# EAGLE board Proiect TSC v6 (EAGLE 9.7.0)
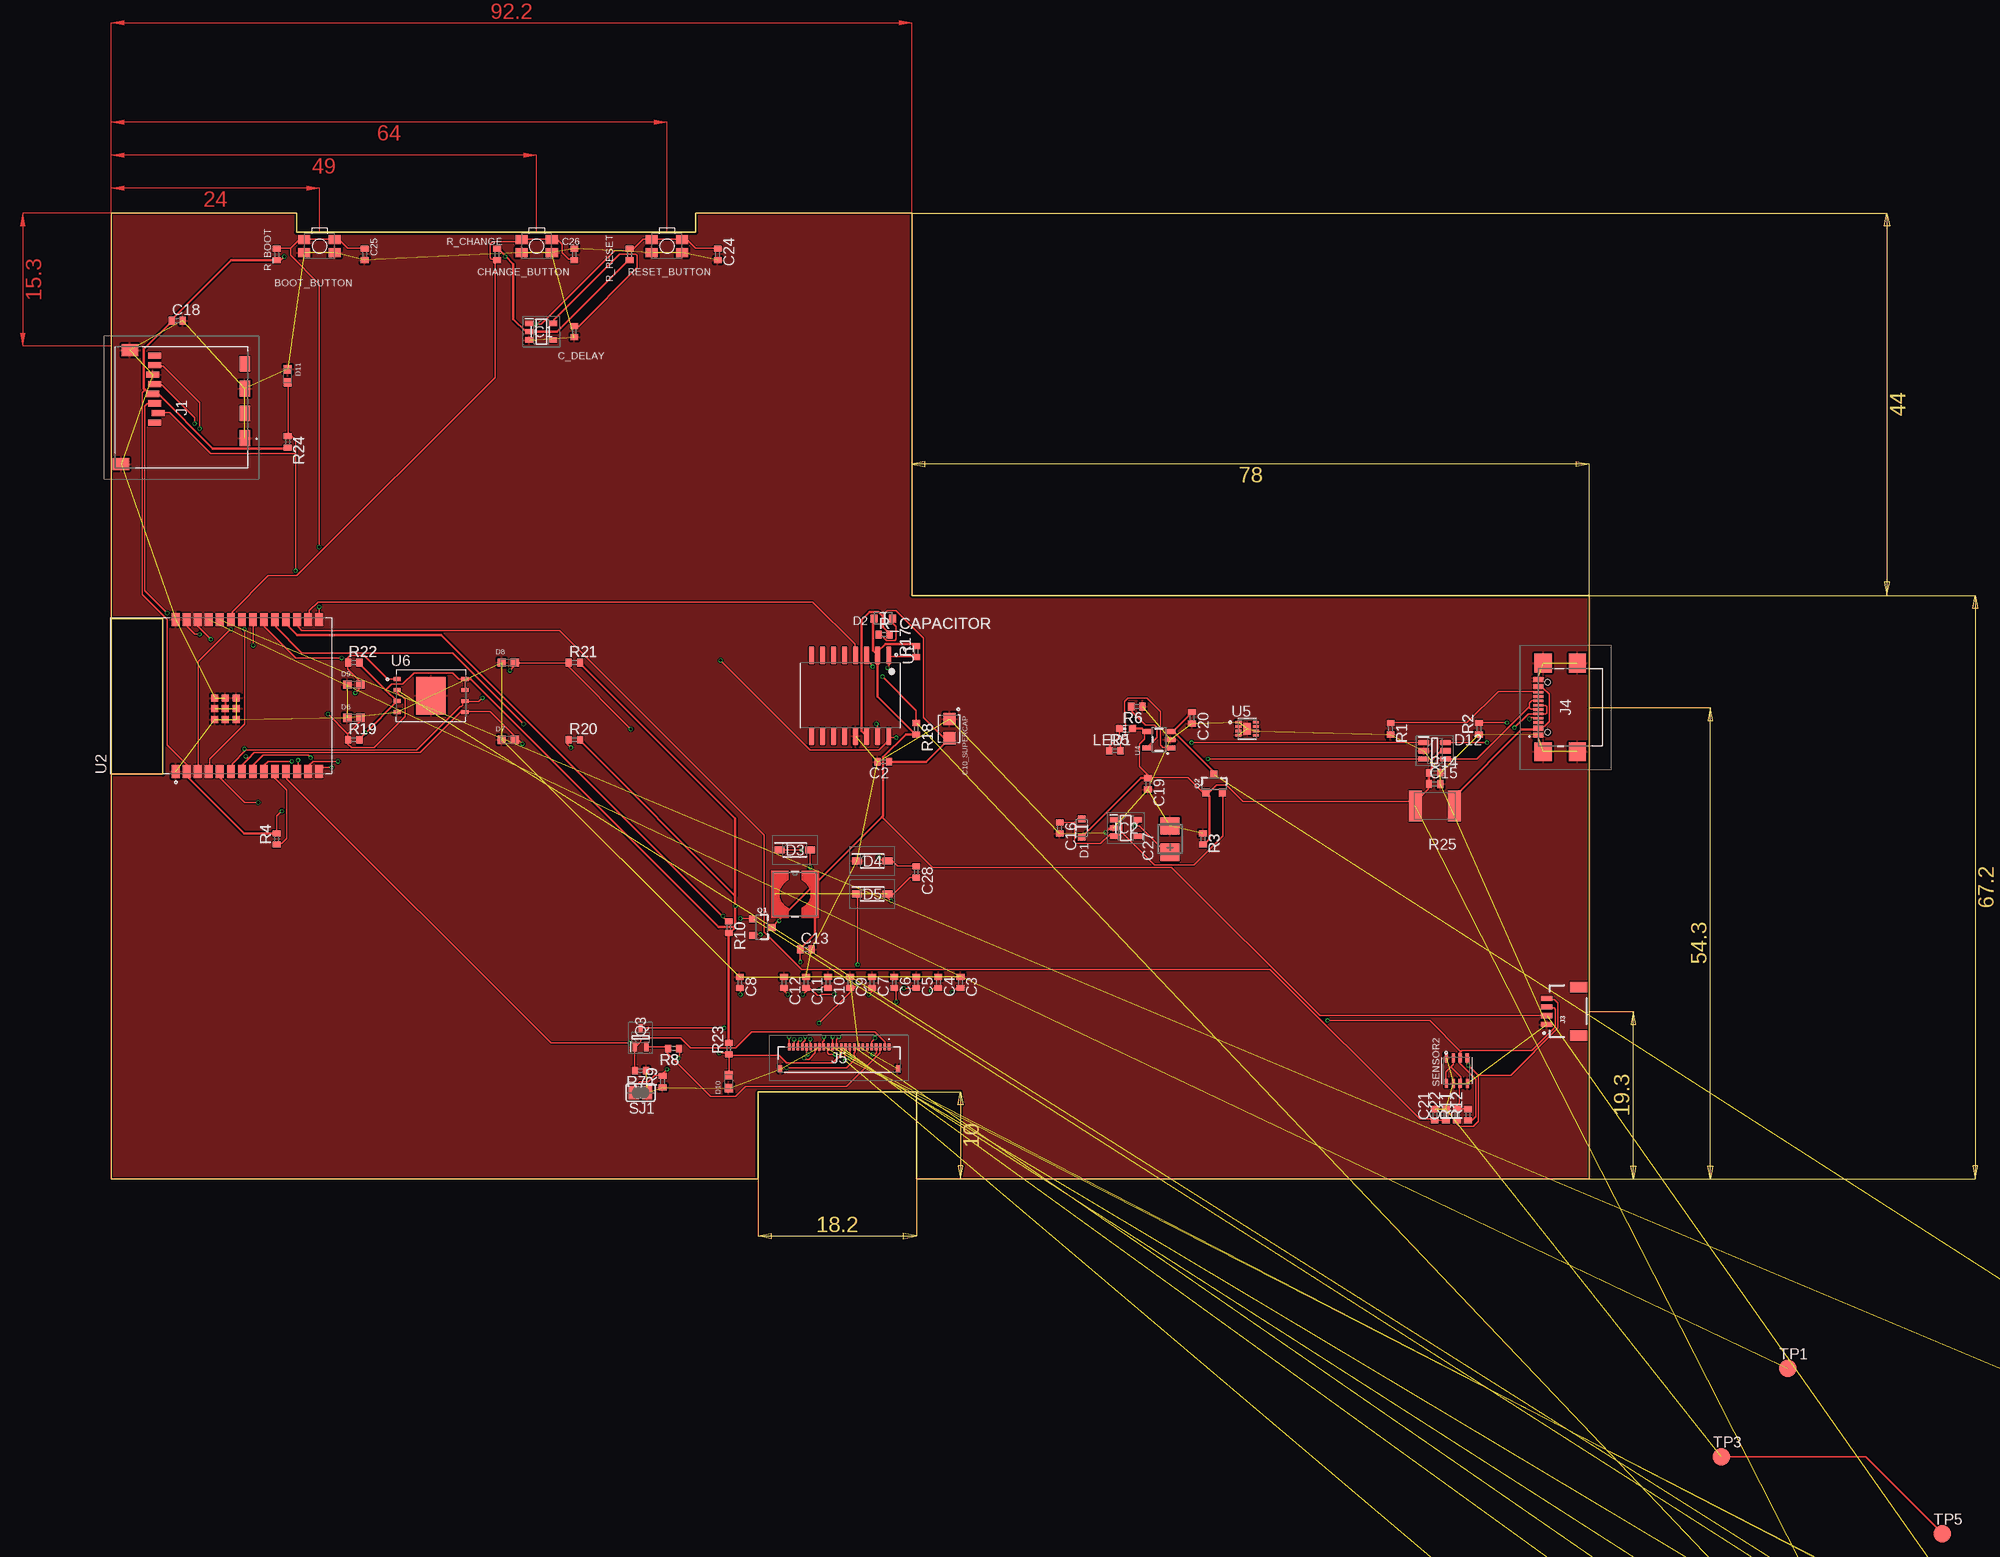
[diagram p0: board, top side]
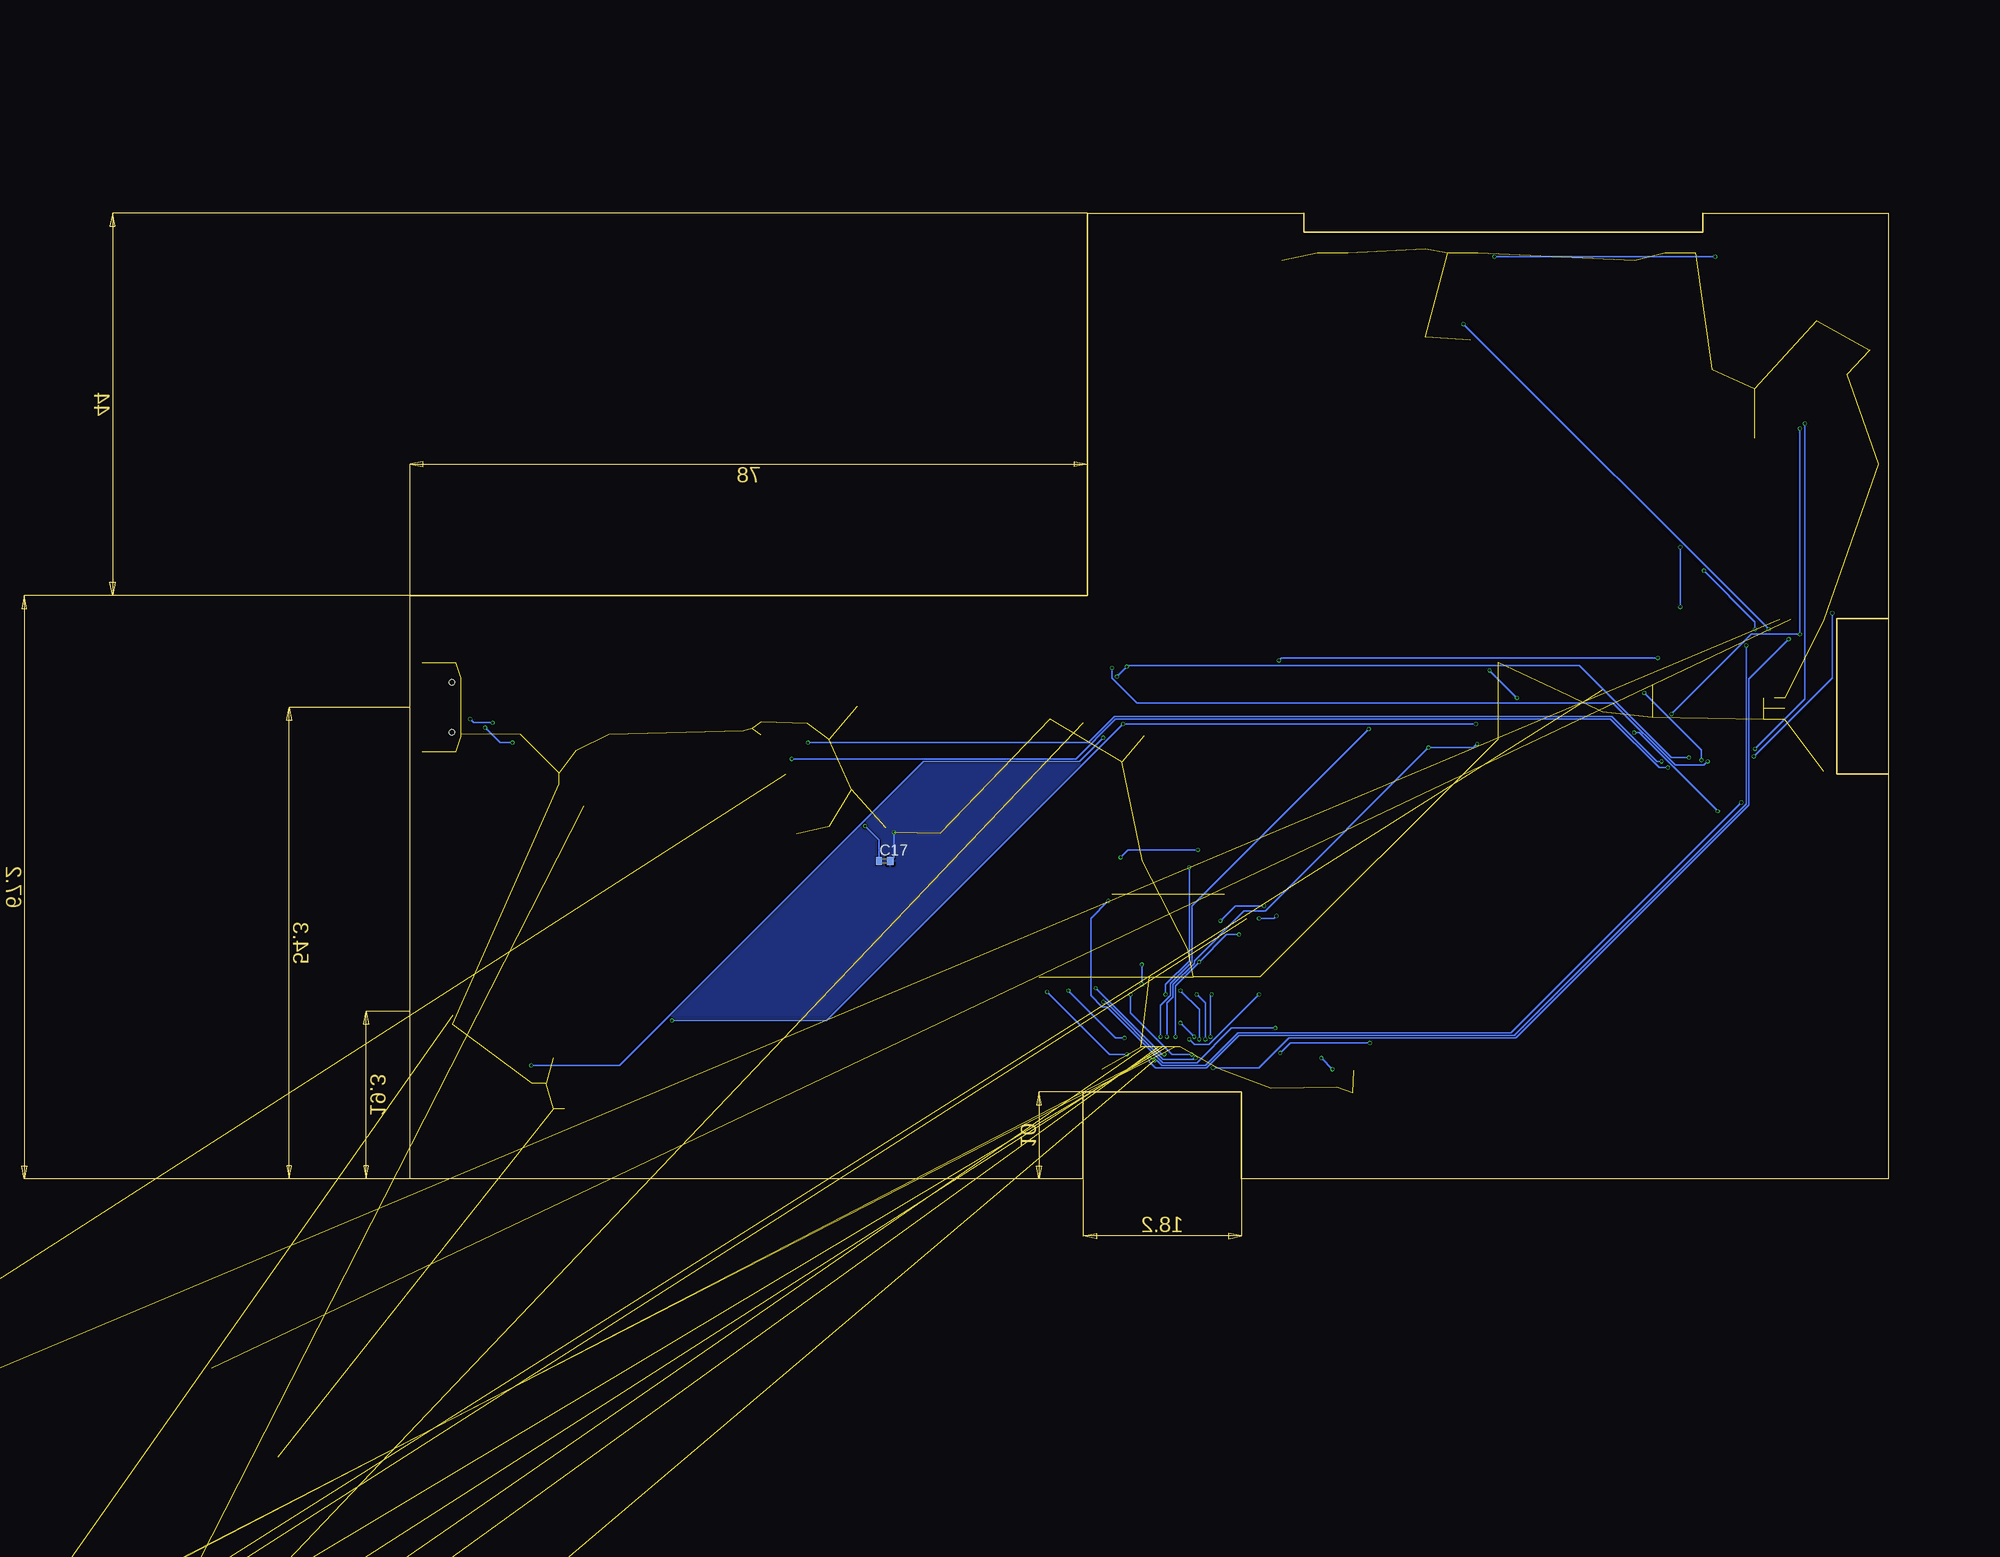
[diagram p1: board, bottom side, seen from below]

Size 170.2 x 111.2 mm. Coordinates in mm from the lower left corner, seen from the top.
Outline: 0,64.54 0,111.2 21.35,111.2 21.35,108.99 67.31,108.99 67.31,111.2 92.2,111.2 92.2,67.2 170.2,67.2 170.2,0 92.71,0 92.71,10 74.51,10 74.51,0 0,0 0,46.62
Outline: 0,64.54 0,46.62
Outline: 0,64.54 5.96,64.54 5.96,46.62 0,46.62
Copper layers (1*16): Top 0.035mm / dielectric 1.6mm / Bottom 0.035mm
Design rules "Fusion Electronics Design Rules": minimum track width 0.16mm, minimum drill 0.3mm, track to track 5mil, track to pad 5mil, pad to pad 5mil, via to via 5mil, smd to smd 5mil, copper to edge 0.2mm, drill to drill 6mil, minimum pad ring 10mil, minimum via ring 3mil, stop-mask expansion 4mil, vias tented up to drill 0mil, thermal gap 10mil

## Footprints (pad centres in the part's own frame; a part is rotated, then mirrored left to right if it is on the bottom)
MYBUTTON = smd 1.4 x 1.05: 1 1.75,0.75; 2 -1.75,0.75; 3 -1.75,-0.75; 4 1.75,-0.75
ESP32_WROVER_EAGLE-LTSPICE_C0402 = smd 0.7 x 0.9: 1 -0.65,0; 2 0.65,0
CAPCP3225X100N = smd 1.4 x 1.4: 1 -1.1,0; 2 1.1,0
RCL_CT3528 = smd 2 x 2.2: + -1.5,0; - 1.5,0
ESP32_WROVER_AVX---SD0805S020S1R0_AVX_SD0805S020S1R0_0 = smd 0.8 x 0.9: 1 -1.05,0; 2 1.05,0
SOD3716X135N = smd 1.15 x 0.8: 1 -1.75,0; 2 1.75,0
DIOC1608X36N = smd 0.97 x 0.94: 1 -0.75,0; 2 0.75,0
SOT95P280X145-6N = smd 1.2 x 0.6: 1 -1.25,0.95; 2 -1.25,0; 3 -1.25,-0.95; 4 1.25,-0.95; 5 1.25,0; 6 1.25,0.95
SOT95P280X125-5N = smd 0.9 x 0.6: 1 -1.4,0.95; 2 -1.4,0; 3 -1.4,-0.95; 4 1.4,-0.95; 5 1.4,0.95
SOT95P280X120-5N = smd 0.9 x 0.6: 1 -1.4,0.95; 2 -1.4,0; 3 -1.4,-0.95; 4 1.4,-0.95; 5 1.4,0.95
112ATAARR03ATTEND = smd 1.8 x 1.2: G1 10.6,10.4; G2 4.9,10.4; S1 7.75,10.4; S2 2.05,10.4 | smd 1.4 x 1.9: G3 13.6,-3.85; G4 0.45,-2.85 | smd 0.7 x 1.5: P1 8.8,0; P2 7.7,0.4; P3 6.6,0; P4 5.5,-0.2; P5 4.4,0; P6 3.3,-0.2; P7 2.2,0; P8 1.1,0
JST04_1MM_RA = smd 0.6 x 1.35: 1 -1.5,0; 2 -0.5,0; 3 0.5,0; 4 1.5,0 | smd 1.2 x 2: NC1 2.8,-3.675; NC2 -2.8,-3.675
SAMACSYS_PARTS_USB4110GFA = smd 0.3 x 1.15: A1 -3.35,3.678; A4 -2.55,3.678; A5 -1.25,3.678; A6 -0.25,3.678; A7 0.25,3.678; A8 1.25,3.678; A9 2.55,3.678; A12 3.35,3.678; B1 3.05,3.678; B4 2.25,3.678; B5 1.75,3.678; B6 0.75,3.678; B7 -0.75,3.678; B8 -1.75,3.678; B9 -2.25,3.678; B12 -3.05,3.678 | smd 2.18 x 2: MP1 -5.11,-0.827; MP2 5.11,-0.827; MP3 -5.11,3.103; MP4 5.11,3.103 | hole 0.65: -2.89,2.603; 2.89,2.603
FH34SRJ24S05SH99 = smd 0.3 x 0.8: 1 5.75,1.45; 2 5.25,1.45; 3 4.75,1.45; 4 4.25,1.45; 5 3.75,1.45; 6 3.25,1.45; 7 2.75,1.45; 8 2.25,1.45; 9 1.75,1.45; 10 1.25,1.45; 11 0.75,1.45; 12 0.25,1.45; 13 -0.25,1.45; 14 -0.75,1.45; 15 -1.25,1.45; 16 -1.75,1.45; 17 -2.25,1.45; 18 -2.75,1.45; 19 -3.25,1.45; 20 -3.75,1.45; 21 -4.25,1.45; 22 -4.75,1.45; 23 -5.25,1.45; 24 -5.75,1.45 | smd 0.4 x 0.8: MP1 6.75,-1.05; MP2 -6.75,-1.05
IND_4828-WE-TPC_WRE = smd 0.127 x 0.127: 1 -2.286,0; 2 2.286,0
ADAFRUIT_CHIP-LED0603 = smd 0.8 x 0.8: A 0,-0.75; C 0,0.75
ESP32_WROVER_SPARKFUN-DISCRETESEMI_SOT23-3 = smd 0.8 x 0.9: 1 -0.95,-1; 2 0.95,-1; 3 0,1.1
SOT65P210X110-3N = smd 1.05 x 0.5: 1 -1.05,0.65; 2 -1.05,-0.65; 3 1.05,0
ESP32_WROVER_EAGLE-LTSPICE_R0402 = smd 0.7 x 0.9: 1 -0.65,0; 2 0.65,0
ESP32C6_VARISTOR_CT/CN1812 = smd 1.5 x 3.6: 1 -2.25,0; 2 2.25,0
ESP32_WROVER_BME680_PSON80P300X300X100-8N = smd 1.016 x 0.5: 1 1.458,1.2; 2 1.458,0.4; 3 1.458,-0.4; 4 1.458,-1.2; 5 -1.458,-1.22; 6 -1.458,-0.4; 7 -1.458,0.4; 8 -1.458,1.2
SJ = smd 1.168 x 1.6: 1 -0.762,0; 2 0.762,0
TP20R = smd 2 x 2: TP 0,0
SOIC127P1032X265-16N = smd 2.05 x 0.59: 1 -4.655,4.445; 2 -4.655,3.175; 3 -4.655,1.905; 4 -4.655,0.635; 5 -4.655,-0.635; 6 -4.655,-1.905; 7 -4.655,-3.175; 8 -4.655,-4.445; 9 4.655,-4.445; 10 4.655,-3.175; 11 4.655,-1.905; 12 4.655,-0.635; 13 4.655,0.635; 14 4.655,1.905; 15 4.655,3.175; 16 4.655,4.445
XCVR_ESP32-C6-WROOM-1-N8 = smd 1.5 x 0.9: 1 -8.75,5.26; 2 -8.75,3.99; 3 -8.75,2.72; 4 -8.75,1.45; 5 -8.75,0.18; 6 -8.75,-1.09; 7 -8.75,-2.36; 8 -8.75,-3.63; 9 -8.75,-4.9; 10 -8.75,-6.17; 11 -8.75,-7.44; 12 -8.75,-8.71; 13 -8.75,-9.98; 14 -8.75,-11.25; 15 8.75,-11.25; 16 8.75,-9.98; 17 8.75,-8.71; 18 8.75,-7.44; 19 8.75,-6.17; 20 8.75,-4.9; 21 8.75,-3.63; 22 8.75,-2.36; 23 8.75,-1.09; 24 8.75,0.18; 25 8.75,1.45; 26 8.75,2.72; 27 8.75,3.99; 28 8.75,5.26 | smd 0.8 x 0.8: 29_1 -2.755,0.79; 29_2 -1.505,0.79; 29_3 -0.255,0.79; 29_4 -2.755,-0.46; 29_5 -1.505,-0.46; 29_6 -0.255,-0.46; 29_7 -2.755,-1.71; 29_8 -1.505,-1.71; 29_9 -0.255,-1.71
ESP32_WROVER_SPARKFUN-IC-POWER_SOT23-5 = smd 0.55 x 1.2: 1 -0.95,-1.3; 2 0,-1.3; 3 0.95,-1.3; 4 0.95,1.3; 5 -0.95,1.3
SON50P200X200X80-9N = smd 0.76 x 0.27: 1 -0.985,0.75; 2 -0.985,0.25; 3 -0.985,-0.25; 4 -0.985,-0.75; 5 0.985,-0.75; 6 0.985,-0.25; 7 0.985,0.25; 8 0.985,0.75 | smd 0.9 x 1.3: 9 0,0
SON127P600X800X80-9N = smd 0.94 x 0.44: 1 -3.895,1.905; 2 -3.895,0.635; 3 -3.895,-0.635; 4 -3.895,-1.905; 5 3.895,-1.905; 6 3.895,-0.635; 7 3.895,0.635; 8 3.895,1.905 | smd 3.4 x 4.3: 9 0,0

## Placement (x,y rotation side)
BOOT_BUTTON  BUTTON_CUSYOMV1  [MYBUTTON]  24,107.4 180 top
C2  100nF  [ESP32_WROVER_EAGLE-LTSPICE_C0402]  88.9,48.03 180 top
C3  1uF/50V  [ESP32_WROVER_EAGLE-LTSPICE_C0402]  97.79,22.63 270 top
C4  1uF/50V  [ESP32_WROVER_EAGLE-LTSPICE_C0402]  95.25,22.63 270 top
C5  1uF/50V  [ESP32_WROVER_EAGLE-LTSPICE_C0402]  92.71,22.63 270 top
C6  1uF/50V  [ESP32_WROVER_EAGLE-LTSPICE_C0402]  90.17,22.63 270 top
C7  1uF/50V  [ESP32_WROVER_EAGLE-LTSPICE_C0402]  87.63,22.63 270 top
C8  1uF/50V  [ESP32_WROVER_EAGLE-LTSPICE_C0402]  72.39,22.63 270 top
C9  1uF/50V  [ESP32_WROVER_EAGLE-LTSPICE_C0402]  85.09,22.63 270 top
C10  1uF/50V  [ESP32_WROVER_EAGLE-LTSPICE_C0402]  82.55,22.63 270 top
C10_SUPERCAP  CPH3225A  [CAPCP3225X100N]  96.52,51.84 270 top
C11  1uF/50V  [ESP32_WROVER_EAGLE-LTSPICE_C0402]  80.01,22.63 270 top
C12  1uF/50V  [ESP32_WROVER_EAGLE-LTSPICE_C0402]  77.47,22.63 270 top
C13  10uF  [ESP32_WROVER_EAGLE-LTSPICE_C0402]  80.01,26.44 0 top
C14  [ESP32_WROVER_EAGLE-LTSPICE_C0402]  152.4,46.76 0 top
C15  [ESP32_WROVER_EAGLE-LTSPICE_C0402]  152.4,45.49 0 top
C16  4.7uF  [ESP32_WROVER_EAGLE-LTSPICE_C0402]  109.22,40.41 270 top
C17  4.7uF  [ESP32_WROVER_EAGLE-LTSPICE_C0402]  115.57,36.6 0 bottom
C18  100nF  [ESP32_WROVER_EAGLE-LTSPICE_C0402]  7.62,98.83 0 top
C19  4.7Uf  [ESP32_WROVER_EAGLE-LTSPICE_C0402]  119.38,45.49 270 top
C20  4.7Uf  [ESP32_WROVER_EAGLE-LTSPICE_C0402]  124.46,53.11 270 top
C21  100nF  [ESP32_WROVER_EAGLE-LTSPICE_C0402]  152.4,7.39 90 top
C22  100nF  [ESP32_WROVER_EAGLE-LTSPICE_C0402]  153.67,7.39 90 top
C24  1uF  [ESP32_WROVER_EAGLE-LTSPICE_C0402]  69.85,106.45 270 top
C25  100nF  [ESP32_WROVER_EAGLE-LTSPICE_C0402]  29.21,106.45 270 top
C26  100nF  [ESP32_WROVER_EAGLE-LTSPICE_C0402]  53.34,106.45 90 top
C27  100uF TANT  [RCL_CT3528]  121.92,39.14 90 top
C28  [ESP32_WROVER_EAGLE-LTSPICE_C0402]  92.71,35.33 270 top
C_DELAY  100nF  [ESP32_WROVER_EAGLE-LTSPICE_C0402]  53.34,97.56 270 top
CHANGE_BUTTON  BUTTON_CUSYOMV1  [MYBUTTON]  49,107.4 180 top
D1  ESP32_WROVER_AVX---SD0805S020S1R0_AVX_SD0805S020S1R0_0_0AVX_SD0805S020S1R0_0_0  [ESP32_WROVER_AVX---SD0805S020S1R0_AVX_SD0805S020S1R0_0]  111.76,40.41 270 top
D2  ESP32_WROVER_AVX---SD0805S020S1R0_AVX_SD0805S020S1R0_0_0AVX_SD0805S020S1R0_0_0  [ESP32_WROVER_AVX---SD0805S020S1R0_AVX_SD0805S020S1R0_0]  88.9,64.54 180 top
D3  MBR0530  [SOD3716X135N]  78.74,37.87 0 top
D4  MBR0530  [SOD3716X135N]  87.63,36.6 0 top
D5  MBR0530  [SOD3716X135N]  87.63,32.79 0 top
D6  PGB1010603MR  [DIOC1608X36N]  27.94,53.11 0 top
D7  PGB1010603MR  [DIOC1608X36N]  45.72,50.57 0 top
D8  PGB1010603MR  [DIOC1608X36N]  45.72,59.46 0 top
D9  PGB1010603MR  [DIOC1608X36N]  27.94,56.92 0 top
D10  PGB1010603MR  [DIOC1608X36N]  71.12,11.2 90 top
D11  PGB1010603MR  [DIOC1608X36N]  20.32,92.48 270 top
D12  USBLC6-2SC6Y  [SOT95P280X145-6N]  152.4,49.3 0 top
IC1  BD5229G-TR  [SOT95P280X125-5N]  49.53,97.56 0 top
IC2  XC6220A331MR-G  [SOT95P280X120-5N]  116.84,40.41 0 top
J1  112A-TAAR-R03_ATTEND  [112ATAARR03ATTEND]  5,95.9 270 top
J3  QWIIC_RIGHT_ANGLE  [JST04_1MM_RA]  165.3,19.3 90 top
J4  SAMACSYS_PARTS_USB4110-GF-A  [SAMACSYS_PARTS_USB4110GFA]  168,54.3 90 top
J5  FH34SRJ-24S-0.5SH_99_  [FH34SRJ24S05SH99]  83.82,13.74 0 top
L1  744043680IND_4828-WE-TPC_WRE  [IND_4828-WE-TPC_WRE]  78.74,32.79 0 top
LED1  [ADAFRUIT_CHIP-LED0603]  116.84,51.84 90 top
Q1  20V/4.2A/52mΩ/1.4W  [ESP32_WROVER_SPARKFUN-DISCRETESEMI_SOT23-3]  74.93,28.98 270 top
Q2  20V/4.2A/52mΩ/1.4W  [ESP32_WROVER_SPARKFUN-DISCRETESEMI_SOT23-3]  127,45.49 0 top
Q3  SI1308EDL-T1-GE3  [SOT65P210X110-3N]  60.96,16.28 90 top
R1  [ESP32_WROVER_EAGLE-LTSPICE_R0402]  147.32,51.84 270 top
R2  [ESP32_WROVER_EAGLE-LTSPICE_R0402]  157.48,51.84 90 top
R3  100k  [ESP32_WROVER_EAGLE-LTSPICE_R0402]  125.73,39.14 270 top
R4  10K  [ESP32_WROVER_EAGLE-LTSPICE_R0402]  19.05,39.14 90 top
R5  200  [ESP32_WROVER_EAGLE-LTSPICE_R0402]  115.57,49.3 0 top
R6  2k  [ESP32_WROVER_EAGLE-LTSPICE_R0402]  118.11,54.38 180 top
R7  10K  [ESP32_WROVER_EAGLE-LTSPICE_R0402]  60.96,12.47 180 top
R8  0.47  [ESP32_WROVER_EAGLE-LTSPICE_R0402]  64.77,15.01 180 top
R9  2.2  [ESP32_WROVER_EAGLE-LTSPICE_R0402]  63.5,11.2 90 top
R10  10K  [ESP32_WROVER_EAGLE-LTSPICE_R0402]  71.12,28.98 270 top
R11  10K  [ESP32_WROVER_EAGLE-LTSPICE_R0402]  154.94,7.39 90 top
R12  10K  [ESP32_WROVER_EAGLE-LTSPICE_R0402]  156.21,7.39 90 top
R17  10K  [ESP32_WROVER_EAGLE-LTSPICE_R0402]  92.71,60.73 90 top
R18  10K  [ESP32_WROVER_EAGLE-LTSPICE_R0402]  92.71,51.84 270 top
R19  10K  [ESP32_WROVER_EAGLE-LTSPICE_R0402]  27.94,50.57 0 top
R20  10K  [ESP32_WROVER_EAGLE-LTSPICE_R0402]  53.34,50.57 0 top
R21  10K  [ESP32_WROVER_EAGLE-LTSPICE_R0402]  53.34,59.46 0 top
R22  10K  [ESP32_WROVER_EAGLE-LTSPICE_R0402]  27.94,59.46 0 top
R23  10K  [ESP32_WROVER_EAGLE-LTSPICE_R0402]  71.12,15.01 90 top
R24  10K  [ESP32_WROVER_EAGLE-LTSPICE_R0402]  20.32,84.86 270 top
R25  ESP32C6_VARISTORCN1812  [ESP32C6_VARISTOR_CT/CN1812]  152.4,42.95 180 top
R_BOOT  10K  [ESP32_WROVER_EAGLE-LTSPICE_R0402]  19.05,106.45 270 top
R_CAPACITOR  [ESP32_WROVER_EAGLE-LTSPICE_R0402]  89,62.7 0 top
R_CHANGE  10K  [ESP32_WROVER_EAGLE-LTSPICE_R0402]  44.45,106.45 90 top
R_RESET  10K  [ESP32_WROVER_EAGLE-LTSPICE_R0402]  59.69,106.45 270 top
RESET_BUTTON  BUTTON_CUSYOMV1  [MYBUTTON]  64,107.4 180 top
SENSOR2  ESP32_WROVER_BME680_BME680  [ESP32_WROVER_BME680_PSON80P300X300X100-8N]  154.94,12.47 90 top
SJ1  [SJ]  60.96,9.93 180 top
TP1  TPTP20R  [TP20R]  193.04,-21.82 0 top  (outside the outline)
TP2  TPTP20R  [TP20R]  237.49,-24.36 0 top  (outside the outline)
TP3  TPTP20R  [TP20R]  185.42,-31.98 0 top  (outside the outline)
TP4  TPTP20R  [TP20R]  238.76,-30.71 0 top  (outside the outline)
TP5  TPTP20R  [TP20R]  210.82,-40.87 0 top  (outside the outline)
TP6  TPTP20R  [TP20R]  210.82,-45.95 0 top  (outside the outline)
TP7  TPTP20R  [TP20R]  210.82,-51.03 0 top  (outside the outline)
TP8  TPTP20R  [TP20R]  210.82,-56.11 0 top  (outside the outline)
TP9  TPTP20R  [TP20R]  210.82,-61.19 0 top  (outside the outline)
TP10  TPTP20R  [TP20R]  210.82,-66.27 0 top  (outside the outline)
TP11  TPTP20R  [TP20R]  210.82,-71.35 0 top  (outside the outline)
TP12  TPTP20R  [TP20R]  210.82,-76.43 0 top  (outside the outline)
TP13  TPTP20R  [TP20R]  172.72,-61.19 90 top  (outside the outline)
TP14  TPTP20R  [TP20R]  200.66,-45.95 0 top  (outside the outline)
TP15  TPTP20R  [TP20R]  200.66,-51.03 0 top  (outside the outline)
TP16  TPTP20R  [TP20R]  200.66,-56.11 0 top  (outside the outline)
TP17  TPTP20R  [TP20R]  200.66,-61.19 0 top  (outside the outline)
U1  DS3231SN#  [SOIC127P1032X265-16N]  85.09,55.65 270 top
U2  ESP32-C6-WROOM-1-N8  [XCVR_ESP32-C6-WROOM-1-N8]  12.7,55.65 90 top
U4  ESP32_WROVER_SPARKFUN-IC-POWER_MCP73831  [ESP32_WROVER_SPARKFUN-IC-POWER_SOT23-5]  120.65,50.57 90 top
U5  MAX17048G+T10  [SON50P200X200X80-9N]  130.81,51.84 0 top
U6  W25Q512JVEIQ  [SON127P600X800X80-9N]  36.83,55.65 0 top

## Library data of the parts
BOOT_BUTTON CHANGE_BUTTON LED1 R25 RESET_BUTTON SJ1 TP1-TP17 = DeskAssistant v19 v1
C2-C22 C24-C26 C28 C_DELAY = DeskAssistant v19 v1; SPICEMODEL: NONE; SPICEPREFIX: C
C10_SUPERCAP = DeskAssistant v19 v1; AVAILABILITY: Not in stock; CHECK_PRICES: https://www.snapeda.com/parts/CPH3225A/Seiko+Instruments/view-part/?ref=eda; DESCRIPTION: 11 mF (EDLC) Supercapacitor 3.3 V 1210 (3225 Metric) - -; MF: Seiko Instruments; MP: CPH3225A; PACKAGE: 1210 Seiko; PRICE: None; PURCHASE-URL: https://www.snapeda.com/api/url_track_click_mouser/?unipart_id=562593&manufacturer=Seiko Instruments&part_name=CPH3225A&search_term=None; SNAPEDA_LINK: https://www.snapeda.com/parts/CPH3225A/Seiko+Instruments/view-part/?ref=snap
C27 = DeskAssistant v19 v1; SPICEPREFIX: C
D1 D2 = DeskAssistant v19 v1; CENTROID_NOT_SPECIFIED: No; DATASHEET: http://datasheets.avx.com/schottky.pdf; DIGIKEY_DESCRIPTION: DIODE SCHOTTKY 20V 1A 0805; DIGIKEY_PART_NUMBER: 478-7800-1-ND; LEAD_FREE: yes; MF: AVX; MOUSER_PART_NUMBER: 581-SD0805S020S1R0; PACKAGE: 0805 (2012 metric); PREFIX: D; ROHS: yes; TEMPERATURE_RANGE_HIGH: +125°C; TEMPERATURE_RANGE_LOW: -55°C
D3-D5 = DeskAssistant v19 v1; AVAILABILITY: In Stock; CHECK_PRICES: https://www.snapeda.com/parts/MBR0530/Onsemi/view-part/?ref=eda; DESCRIPTION: Diode Schottky 30 V 500mA Surface Mount SOD-123; MF: ON Semiconductor; MP: MBR0530; PACKAGE: SOD-123-2 ON Semiconductor; PRICE: None; PURCHASE-URL: https://www.snapeda.com/api/url_track_click_mouser/?unipart_id=179458&manufacturer=ON Semiconductor&part_name=MBR0530&search_term=None; SNAPEDA_LINK: https://www.snapeda.com/parts/MBR0530/Onsemi/view-part/?ref=snap
D6-D11 = DeskAssistant v19 v1; AVAILABILITY: In Stock; CHECK_PRICES: https://www.snapeda.com/parts/PGB1010603MR/Littelfuse/view-part/?ref=eda; DESCRIPTION: 150V (Typ) Clamp - Ipp Tvs Diode Surface Mount 0603 (1608 Metric); MF: Littelfuse Inc.; MP: PGB1010603MR; PACKAGE: 0603 Littelfuse Inc.; PRICE: None; PURCHASE-URL: https://www.snapeda.com/api/url_track_click_mouser/?unipart_id=5659453&manufacturer=Littelfuse Inc.&part_name=PGB1010603MR&search_term=None; SNAPEDA_LINK: https://www.snapeda.com/parts/PGB1010603MR/Littelfuse/view-part/?ref=snap
D12 = DeskAssistant v19 v1; AVAILABILITY: In Stock; CHECK_PRICES: https://www.snapeda.com/parts/USBLC6-2SC6Y/STMicroelectronics/view-part/?ref=eda; DESCRIPTION: 17V Clamp 5A (8/20µs) Ipp Tvs Diode Surface Mount SOT-23-6; MF: STMicroelectronics; MP: USBLC6-2SC6Y; PACKAGE: SOT-23-6 STMicroelectronics; PRICE: None; SNAPEDA_LINK: https://www.snapeda.com/parts/USBLC6-2SC6Y/STMicroelectronics/view-part/?ref=snap
IC1 = DeskAssistant v19 v1; DESCRIPTION: Voltage Detector with Adjustable Delay Time: CMOS processes are utilized to develop high precision, low current consumption CMOS reset ICs that allow arbitrary setting of the delay time. The extensive lineup includes both Nch Open Drain and CMOS output types in a wide range of detection voltages (from 2.3V to 6.0V, in 0.1V steps), enabling selection of the ideal solution based on customer requirements. In addition, the entire series is of course both lead-free and RoHS-compliant.; HEIGHT: 1.25mm; MANUFACTURER_NAME: ROHM Semiconductor; MANUFACTURER_PART_NUMBER: BD5229G-TR; MOUSER_PART_NUMBER: 755-BD5229G-TR; MOUSER_PRICE-STOCK: https://www.mouser.co.uk/ProductDetail/ROHM-Semiconductor/BD5229G-TR?qs=4kLU8WoGk0vvnhrrYwdszw%3D%3D
IC2 = DeskAssistant v19 v1; DESCRIPTION: LDO Voltage Regulators; HEIGHT: 1.2mm; MANUFACTURER_NAME: Torex; MANUFACTURER_PART_NUMBER: XC6220A331MR-G; MOUSER_PART_NUMBER: 865-XC6220A331MR-G; MOUSER_PRICE-STOCK: https://www.mouser.co.uk/ProductDetail/Torex-Semiconductor/XC6220A331MR-G?qs=AsjdqWjXhJ8ZSWznL1J0gg%3D%3D
J1 = DeskAssistant v19 v1; DESCRIPTION: Micro SD Card Socket, Push-Push Type, Top Mount, SMT, H=1.83mm, 10u; HEIGHT: 1.9mm; MANUFACTURER_NAME: ATTEND; MANUFACTURER_PART_NUMBER: 112A-TAAR-R03 ATTEND
J3 = DeskAssistant v19 v1; PROD_ID: CONN-13694
J4 = DeskAssistant v19 v1; DESCRIPTION: CONN USB 2.0 TYPE-C R/A SMT; HEIGHT: 3.26mm; MANUFACTURER_NAME: GCT (GLOBAL CONNECTOR TECHNOLOGY); MANUFACTURER_PART_NUMBER: USB4110-GF-A; MOUSER_PART_NUMBER: 640-USB4110-GF-A; MOUSER_PRICE-STOCK: https://www.mouser.co.uk/ProductDetail/GCT/USB4110-GF-A?qs=KUoIvG%2F9IlYiZvIXQjyJeA%3D%3D
J5 = DeskAssistant v19 v1; DESCRIPTION: 24 Position FFC, FPC Connector Contacts, Top and Bottom 0.020" (0.50mm) Surface Mount, Right Angle; HEIGHT: 1.1mm; MANUFACTURER_NAME: Hirose; MANUFACTURER_PART_NUMBER: FH34SRJ-24S-0.5SH(99); MOUSER_PART_NUMBER: 798-FH34SRJ24S05SH99; MOUSER_PRICE-STOCK: https://www.mouser.co.uk/ProductDetail/Hirose-Connector/FH34SRJ-24S-0.5SH99?qs=vcbW%252B4%252BSTIpKBl5ap9J8Fw%3D%3D
L1 = DeskAssistant v19 v1; COPYRIGHT: Copyright (C) 2024 Ultra Librarian. All rights reserved.; MANUFACTURER_PART_NUMBER: 744043680; MFR_NAME: Wurth Electronics
Q1 Q2 = DeskAssistant v19 v1; PROD_ID: TRAN-14388
Q3 = DeskAssistant v19 v1; AVAILABILITY: In Stock; CHECK_PRICES: https://www.snapeda.com/parts/SI1308EDL-T1-GE3/Vishay+Siliconix/view-part/?ref=eda; DESCRIPTION: Si1308EDL-T1-GE3 N-channel MOSFET Transistor, 1.5 A, 30 V, 3-Pin SC-70 | Siliconix / Vishay SI1308EDL-T1-GE3; MF: Vishay Siliconix; MP: SI1308EDL-T1-GE3; PACKAGE: SOT-323 Vishay Semiconductor; PRICE: None; PURCHASE-URL: https://www.snapeda.com/api/url_track_click_mouser/?unipart_id=274603&manufacturer=Vishay Siliconix&part_name=SI1308EDL-T1-GE3&search_term=None; SNAPEDA_LINK: https://www.snapeda.com/parts/SI1308EDL-T1-GE3/Vishay+Siliconix/view-part/?ref=snap
R1-R12 R17-R24 R_BOOT R_CAPACITOR R_CHANGE R_RESET = DeskAssistant v19 v1; SPICEMODEL: NONE; SPICEPREFIX: R
SENSOR2 = DeskAssistant v19 v1; AVAILABILITY: Unavailable; DESCRIPTION: Integrated Environmental Unit; MF: Bosch Sensortec; MP: BME680; PACKAGE: LGA-8 Bosch Tools; PRICE: None
U1 = DeskAssistant v19 v1; AVAILABILITY: In Stock; CHECK_PRICES: https://www.snapeda.com/parts/DS3231SN%23/Analog+Devices/view-part/?ref=eda; DESCRIPTION: Extremely Accurate I²C-Integrated RTC/TCXO/Crystal; MF: Analog Devices; MP: DS3231SN#; PACKAGE: SOIC-16 Maxim; PRICE: None; PURCHASE-URL: https://www.snapeda.com/api/url_track_click_mouser/?unipart_id=99048&manufacturer=Analog Devices&part_name=DS3231SN#&search_term=None; SNAPEDA_LINK: https://www.snapeda.com/parts/DS3231SN%23/Analog+Devices/view-part/?ref=snap
U2 = DeskAssistant v19 v1; AVAILABILITY: In Stock; CHECK_PRICES: https://www.snapeda.com/parts/ESP32-C6-WROOM-1-N8/Espressif+Systems/view-part/?ref=eda; DESCRIPTION: Multiprotocol Modules ESP32-C6 module, Wi-Fi 6 in 2.4 GHz band, Bluetooth 5, Zigbee 3.0 and Thread. ESP34-WROOM Compatible - ENGINEERING SAMPLE; MF: Espressif Systems; MP: ESP32-C6-WROOM-1-N8; PACKAGE: None; PRICE: None; SNAPEDA_LINK: https://www.snapeda.com/parts/ESP32-C6-WROOM-1-N8/Espressif+Systems/view-part/?ref=snap
U4 = DeskAssistant v19 v1; PROD_ID: IC-09995
U5 = DeskAssistant v19 v1; AVAILABILITY: In Stock; CHECK_PRICES: https://www.snapeda.com/parts/MAX17048G+T10/Analog+Devices/view-part/?ref=eda; DESCRIPTION: 3µA 1-Cell/2-Cell Fuel Gauge with ModelGauge; MF: Analog Devices; MP: MAX17048G+T10; PACKAGE: TDFN-8 Maxim; PRICE: None; PURCHASE-URL: https://www.snapeda.com/api/url_track_click_mouser/?unipart_id=329239&manufacturer=Analog Devices&part_name=MAX17048G+T10&search_term=None; SNAPEDA_LINK: https://www.snapeda.com/parts/MAX17048G+T10/Analog+Devices/view-part/?ref=snap
U6 = DeskAssistant v19 v1; AVAILABILITY: In Stock; CHECK_PRICES: https://www.snapeda.com/parts/W25Q512JVEIQ/Winbond+Electronics/view-part/?ref=eda; DESCRIPTION: FLASH - NOR Memory IC 512Mb (64M x 8) SPI - Quad I/O 133 MHz 8-WSON (8x6); MF: Winbond Electronics; MP: W25Q512JVEIQ; PACKAGE: Package; PRICE: None; SNAPEDA_LINK: https://www.snapeda.com/parts/W25Q512JVEIQ/Winbond+Electronics/view-part/?ref=snap

## Nets
3V3: C18.1 D2.2 IC1.2 J1.P4 J3.2 Q1.3 R4.2 R10.2 R17.2 R18.2 R19.2 R20.2 R21.2 R22.2 R23.2 R24.2 R_BOOT.2 R_CHANGE.2 R_RESET.2 TP6.TP U1.2 U2.2 U6.3 U6.7 U6.8
32KHZ: R17.1 U1.1 U2.9
DN: D12.6 J4.A7 J4.B7
DP: D12.4 J4.A6 J4.B6
EPD_3V3: C13.1 J5.16 L1.2 Q1.2 TP7.TP
EPD_3V3_C: Q1.1 R10.1 TP15.TP U2.18
EPD_BUSY: J5.9 TP11.TP U2.26
EPD_CS: D10.2 J5.12 R23.1 TP12.TP U2.11
EPD_DC: J5.11 TP13.TP U2.5
EPD_RST: J5.10 TP14.TP U2.21
FLASH_CS: D9.2 R22.1 U2.12 U6.1
GDR: J5.2 Q3.1 R7.2
GND: BOOT_BUTTON.1 BOOT_BUTTON.2 C2.2 C3.1 C4.1 C5.1 C6.1 C7.1 C8.1 C9.1 C10.1 C10_SUPERCAP.1 C11.1 C12.1 C13.2 C14.2 C15.2 C16.2 C17.2 C18.2 C19.2 C20.2 C21.2 C22.2 C24.2 C25.2 C26.2 C27.- C_DELAY.2 CHANGE_BUTTON.1 CHANGE_BUTTON.2 D4.1 D6.1 D7.1 D8.1 D9.1 D10.1 D11.1 D12.2 IC1.3 IC2.2 J1.G1 J1.G2 J1.G3 J1.G4 J1.P6 J3.1 J4.A1 J4.A12 J4.B1 J4.B12 J4.MP1 J4.MP2 J4.MP3 J4.MP4 J5.8 J5.17 J5.MP1 J5.MP2 R1.2 R2.1 R3.1 R6.1 R7.1 R9.1 RESET_BUTTON.1 RESET_BUTTON.2 SENSOR2.1 SENSOR2.5 SENSOR2.7 SJ1.1 TP3.TP TP5.TP U1.13 U2.1 U2.28 U2.29_1 U2.29_2 U2.29_3 U2.29_4 U2.29_5 U2.29_6 U2.29_7 U2.29_8 U2.29_9 U4.2 U5.1 U5.4 U5.6 U5.9 U6.4 U6.9
GPIO8: R4.1 U2.10
I2C_PW: C21.1 C22.1 R11.2 R12.2 SENSOR2.2 SENSOR2.6 SENSOR2.8 U2.17
INT_RTC: R18.1 TP17.TP U1.3 U2.8
IO/BOOT: BOOT_BUTTON.3 BOOT_BUTTON.4 C25.1 R_BOOT.1 U2.15
IO/CHANGE: C26.1 CHANGE_BUTTON.3 CHANGE_BUTTON.4 R_CHANGE.1 U2.23
MISO: D6.2 J1.P7 R19.1 TP8.TP U2.27 U6.2
MOSI: D7.2 J1.P3 J5.14 R20.1 TP9.TP U2.7 U6.5
N$5: J4.A5 R2.2
N$6: J4.B5 R1.1
N$14: C16.1 D1.1 IC2.1 IC2.3 Q2.2
N$16: C17.1 C27.+ IC2.5
N$39: R5.2 U4.1
N$40: LED1.C R5.1
N$46: R6.2 U4.5
N$52: C28.1 D3.1 D4.2
N$59: C12.2 J5.24
N$61: C10.2 J5.22
N$63: C7.2 J5.20
N$64: C8.2 J5.19
N$65: C6.2 J5.18
N$73: C5.2 J5.15
N$74: C4.2 J5.5
N$75: C3.2 J5.4
N$87: C_DELAY.1 IC1.5
N$91: U5.7
N$92: U5.8
N$93: U5.2 U5.3
N$127: D2.1 R_CAPACITOR.1
PREVGH: C9.2 D5.1 J5.21
PREVGL: C11.2 D3.2 J5.23
RESE: J5.3 Q3.2 R8.2
RESE': R8.1 R9.2 SJ1.2
RESET: C24.1 IC1.1 R_RESET.1 RESET_BUTTON.3 RESET_BUTTON.4 U2.3
RTC_RST: U1.4 U2.16
RX: TP4.TP U2.24
SCK: D8.2 J1.P5 J5.13 R21.1 TP10.TP U2.6 U6.6
SCL: J3.4 R11.1 SENSOR2.4 U1.16 U2.20
SDA: J3.3 R12.1 SENSOR2.3 U1.15 U2.19
SRC: C28.2 D5.2 L1.1 Q3.3
SS_SD: D11.2 J1.P2 R24.1 U2.4
TX: TP1.TP U2.25
USB_D+: D12.3 U2.14
USB_D-: D12.1 U2.13
VBAT: C20.1 Q2.3 TP2.TP U4.3
VBUS: C14.1 C15.1 C19.1 D1.2 D12.5 LED1.A Q2.1 R3.2 R25.2 TP16.TP U4.4
VRTC: C2.1 C10_SUPERCAP.2 R_CAPACITOR.2 U1.14
VUSB: J4.A4 J4.A9 J4.B4 J4.B9 R25.1

## Tracks (layer width: path | path; a pad name or v marks a point on that pad's centre or on a via)
3V3  (via drill 0.3)  (1 unrouted)
  Top 0.16: 88.77,41.67 94.57,35.88 122.12,35.88 139.19,18.81 165.17,18.81 J3.2 | v19.95,106.2 19.52,105.77 19.09,105.77 R_BOOT.2 | v45.35,106.2 45.4,106.25 | U6.7 40.75,56.4 40.75,57.41 U6.8 40.61,57.55 40.04,57.55 39.32,58.27 34.87,58.27 33.58,56.98 32.29,56.98 31.63,56.32 | 71.69,29 71.75,28.99 71.82,28.93 | v19.66,42.34 19.09,41.77 19.09,39.9 R4.2 | v29.27,51.38 29.29,51.37 | 3.92,90.88 3.59,90.56 3.59,67.31 6.46,64.44 6.46,49.94 8.75,47.65 8.75,46.93 U2.2 | v76.92,29.71 76.86,29.76 | v71.89,31.43 71.85,31.43
  Top 0.305: R4.2 15.3,39.79 8.71,46.38 U2.2 | R24.2 20.23,84.12 11.7,84.12 5.42,90.4 J1.P4 4.4,90.4 3.92,90.88 3.77,91.03 3.77,95.53 6.97,98.73 C18.1 6.97,98.93 13.84,105.8 R_BOOT.2 | R_CHANGE.2 44.55,107.1 45.4,106.25 46.31,105.34 46.31,99.01 47.76,97.56 IC1.2 51.35,97.56 59.59,105.8 R_RESET.2 | R22.2 28.59,59.36 31.63,56.32 U6.3 29.29,51.37 28.59,50.67 R19.2 | R21.2 53.99,59.36 71.85,41.5 71.85,32.61 | 71.85,29.16 71.85,31.43 71.85,32.61 | 71.85,29.16 71.69,29 69.94,29 41.38,57.55 U6.8 | 71.85,29.16 71.85,28.96 71.82,28.93 71.22,28.33 R10.2 R23.2 | 71.85,32.61 53.99,50.47 R20.2 | U1.2 88.27,55.53 92.61,51.19 R18.2 91.52,51.19 88.9,48.58 88.9,41.8 88.77,41.67 76.86,29.76 76.08,28.98 Q1.3 | U1.2 88.27,60.71 89.17,61.61 92.48,61.61 R17.2 | U1.2 87.72,60.85 87.72,64.41 D2.2
  Bottom 0.16: v19.95,106.2 v45.35,106.2 | v19.66,42.34 28.7,51.38 v29.27,51.38 | v76.92,29.71 75.19,31.43 v71.89,31.43
32KHZ  (via drill 0.3)
  Top 0.16: 89.54,60.28 89.69,60.13 92.7,60.13 R17.1 | v20.81,48.08 18.08,48.08 17.65,47.65 17.65,46.93 U2.9 | v89.4,58.84 89.4,58.98 89.54,59.13 89.54,60.28 | 89.54,60.28 U1.1
  Bottom 0.16: v20.81,48.08 21.24,47.65 24.54,47.65 31.71,54.82 86.53,54.82 89.4,57.69 v89.4,58.84
DN  (via drill 0.3)
  Top 0.16: J4.A7 164.45,54.54 165.17,54.54 165.31,54.39 165.31,53.68 165.17,53.53 164.45,53.53 J4.B7 164.31,53.53 163.16,53.53 v161.58,51.95 | v158.42,50.23 153.69,50.23 D12.6
  Bottom 0.16: v158.42,50.23 159.86,50.23 v161.58,51.95
DP
  Top 0.16: 163.3,54.39 163.3,54.82 163.59,55.11 164.31,55.11 J4.B6 | 163.3,54.39 163.3,54.25 163.45,54.11 164.31,54.11 J4.A6 | 163.3,54.39 157.28,48.37 153.69,48.37 D12.4
EPD_3V3  (via drill 0.3)  (1 unrouted)
  Top 0.16: v82.08,16.37 82.08,15.94 81.94,15.79 81.94,15.22 J5.16 | v79.36,24.98 79.36,26.41 C13.1 | v74.76,28.13 74.05,28.13 Q1.2
  Top 0.305: C13.1 79.36,26.54 81.03,28.21 L1.2
  Bottom 0.16: v82.08,16.37 82.08,22.25 v79.36,24.98 76.2,28.13 v74.76,28.13
EPD_3V3_C  (via drill 0.3)  (1 unrouted)
  Top 0.16: v72.47,30 73.9,30 Q1.1 | v70.46,30.29 70.41,30.24
  Top 0.305: R10.1 71.02,29.63 70.41,30.24 38.03,62.62 21.41,62.62 20.14,63.88 U2.18
  Bottom 0.16: v72.47,30 70.75,30 v70.46,30.29
EPD_BUSY  (via drill 0.3)  (1 unrouted)
  Top 0.16: v77.78,12.78 84.67,12.78 85.67,13.78 85.67,14.07 85.53,14.21 85.53,14.5 85.67,14.64 85.67,15.07 J5.9 | v11.48,62.14 9.9,63.72 9.9,64.3 U2.26
  Bottom 0.16: v77.78,12.78 72.47,12.78 69.02,16.22 42.91,16.22 16.07,43.06 16.07,57.55 v11.48,62.14
EPD_CS  (via drill 0.3)  (1 unrouted)
  Top 0.16: 71.18,14.36 71.32,14.21 76.92,14.21 77.78,13.35 83.09,13.35 84.09,14.36 84.09,15.07 J5.12 | 71.18,14.36 71.18,12.06 D10.2 | 71.18,14.36 R23.1 71.03,14.5 v70.03,14.5 | v59.7,15.65 50.66,15.65 20.23,46.07 20.23,46.79 U2.11
  Bottom 0.16: v59.7,15.65 68.88,15.65 v70.03,14.5
EPD_DC  (via drill 0.3)  (1 unrouted)
  Top 0.16: v84.52,13.64 84.52,15.07 J5.11 | v16.93,43.34 15.35,43.34 12.48,46.21 12.48,46.79 U2.5
  Bottom 0.16: v84.52,13.64 84.23,13.64 83.66,13.06 78.64,13.06 74.91,16.8 43.48,16.8 v16.93,43.34
EPD_RST  (via drill 0.3)  (1 unrouted)
  Top 0.16: v85.1,13.93 85.1,15.07 J5.10 | v16.36,61.42 16.36,64.3 U2.21
  Bottom 0.16: v85.1,13.93 85.1,13.5 84.38,12.78 78.5,12.78 74.76,16.51 43.05,16.51 16.36,43.2 v16.36,61.42
FLASH_CS  (via drill 0.3)
  Top 0.16: U6.1 32.86,57.55 31.86,57.55 29.13,60.28 27.55,60.28 27.12,59.85 27.12,59.7 27.27,59.56 R22.1 27.27,59.42 27.27,58.7 28.56,57.41 28.56,56.98 D9.2 28.56,56.83 28.56,56.4 v28.13,55.97 | v21.52,48.22 21.52,46.93 U2.12
  Bottom 0.16: v21.52,48.22 21.52,49.37 v28.13,55.97
GDR
  Top 0.16: J5.2 89.11,15.22 89.11,15.79 87.97,16.94 73.76,16.94 71.89,15.07 66.73,15.07 65.58,16.22 61.27,16.22 60.99,15.94 60.99,15.79 60.41,15.22 Q3.1 60.27,15.22 60.27,12.49 R7.2
GND  (via drill 0.3)  (88 unrouted)
  Top 0.152: 74.51,0 0,0 0,111.2 21.35,111.2 21.35,108.99 67.31,108.99 67.31,111.2 92.2,111.2 92.2,67.2 170.2,67.2 170.2,0 92.71,0 92.71,10 74.51,10 74.51,0
  Top 0.16: TP3.TP 185.55,-31.99 202.05,-31.99 210.8,-40.75 TP5.TP | U2.29_5 13.2,54.25 13.2,55.25 U2.29_6 | v114.51,39.9 114.94,40.33 115.37,40.33 IC2.2
  Bottom 0.16: v114.51,39.9 114.51,37.03 114.8,36.74 C17.2
  pour Top: 67.35,108.93 67.33,108.91 21.34,108.91 21.31,108.93 21.29,108.95 21.28,108.97 21.28,111.12 0.08,111.12 0.08,0.08 74.43,0.08 74.43,10.02 74.45,10.04 74.47,10.06 74.49,10.08 92.73,10.08 92.75,10.06 92.77,10.04 92.79,10.02 92.79,0.08 170.12,0.08 170.12,67.12 92.18,67.12 92.16,67.14 92.14,67.16 92.12,67.18 92.12,111.12 67.39,111.12 67.39,108.97 67.37,108.95
  pour Bottom: 67.35,108.93 67.33,108.91 21.34,108.91 21.31,108.93 21.29,108.95 21.28,108.97 21.28,111.12 0.08,111.12 0.08,0.08 74.43,0.08 74.43,10.02 74.45,10.04 74.47,10.06 74.49,10.08 92.73,10.08 92.75,10.06 92.77,10.04 92.79,10.02 92.79,0.08 170.12,0.08 170.12,67.12 92.18,67.12 92.16,67.14 92.14,67.16 92.12,67.18 92.12,111.12 67.39,111.12 67.39,108.97 67.37,108.95
GPIO8
  Top 0.16: R4.1 19.09,38.61 19.66,38.61 20.23,39.18 20.23,44.78 18.8,46.21 18.8,46.79 U2.10
I2C_PW
  Top 0.16: 154.26,12.92 154.55,13.21 SENSOR2.2 | 154.26,12.92 153.69,12.35 153.69,11.06 SENSOR2.8 | 154.26,12.92 155.41,11.77 155.41,11.06 SENSOR2.6 155.27,10.91 155.27,8.76 154.84,8.33 154.84,8.04 | R12.2 156.13,8.04 154.98,8.04 R11.2 154.84,8.04 | 154.84,8.04 154.26,7.47 154.12,7.47 153.69,7.04 153.69,6.75 C22.1 153.54,6.75 152.54,6.75 C21.1 152.25,6.89 150.68,6.89 133.46,24.11 79.5,24.11 75.19,28.42 75.19,39.61 51.66,63.15 21.96,63.15 21.52,63.58 21.52,64.3 U2.17
INT_RTC  (via drill 0.3)  (1 unrouted)
  Top 0.16: v88.83,57.84 92.7,53.96 92.7,52.53 R18.1 | v87.68,58.98 87.68,59.13 87.11,59.7 87.11,60.28 U1.3 | v22.96,48.51 22.67,48.8 17.51,48.8 16.36,47.65 16.36,46.93 U2.8
  Bottom 0.16: v88.83,57.84 v87.68,58.98 87.53,59.13 35.59,59.13 24.97,48.51 v22.96,48.51
IO/BOOT  (via drill 0.3)
  Top 0.16: C25.1 29.13,107.2 27.27,107.2 26.4,108.06 25.83,108.06 BOOT_BUTTON.3 25.69,108.21 22.39,108.21 BOOT_BUTTON.4 22.24,108.06 21.52,108.06 20.66,107.2 | 20.66,107.2 19.09,107.2 R_BOOT.1 | v23.96,65.87 23.96,64.44 U2.15 | v23.96,72.76 23.96,103.04 20.66,106.34 20.66,107.2
  Bottom 0.16: v23.96,72.76 v23.96,65.87
IO/CHANGE
  Top 0.16: C26.1 53.24,105.91 52.66,105.91 51.95,106.63 51.95,107.63 51.37,108.21 50.8,108.21 CHANGE_BUTTON.3 50.66,108.21 47.35,108.21 CHANGE_BUTTON.4 47.21,108.06 47.07,107.92 43.91,107.92 43.62,107.63 43.62,106.05 43.77,105.91 44.2,105.91 | 44.2,105.91 44.34,105.91 R_CHANGE.1 44.2,105.91 | 44.2,105.91 44.2,92.28 21.38,69.46 18.08,69.46 13.92,65.3 13.92,64.44 U2.23
MISO  (via drill 0.3)  (1 unrouted)
  Top 0.16: 27.27,51.24 27.27,50.66 R19.1 27.27,50.52 27.27,50.09 27.7,49.66 30.28,49.66 33.87,53.25 33.87,55.25 33.44,55.69 33.29,55.69 33.01,55.97 33.01,56.26 U6.2 | 27.27,51.24 28.7,52.67 D6.2 | v10.19,62.72 9.61,62.72 8.75,63.58 8.75,64.3 U2.27 | 27.27,51.24 v24.97,53.53 | v10.19,86.39 10.19,89.41 6.03,93.57 5.02,93.57 J1.P7
  Bottom 0.16: v24.97,53.53 15.79,62.72 v10.19,62.72 v10.19,86.39
MOSI  (via drill 0.3)  (1 unrouted)
  Top 0.16: v83.09,16.37 83.09,15.22 J5.14 | v52.95,49.66 52.52,50.09 52.52,50.38 52.66,50.52 R20.1 | 15.79,48.37 16.5,49.08 35.59,49.08 40.32,53.82 40.61,53.82 U6.5 40.75,53.82 43.62,53.82 46.35,51.09 46.35,50.66 D7.2 46.49,50.52 46.92,50.52 v47.35,50.09 | 15.79,48.37 15.07,47.65 15.07,46.93 U2.7 | v6.46,65.16 3.87,67.74 3.87,88.98 4.16,89.26 4.88,89.26 J1.P3 | 15.79,48.37 v15.5,48.65
  Bottom 0.16: v83.09,16.37 83.09,20.24 82.37,20.96 82.37,22.39 79.93,24.83 79.93,25.12 74.19,30.86 71.75,30.86 v52.95,49.66 47.78,49.66 v47.35,50.09 | v6.46,65.16 6.46,57.69 v15.5,48.65
N$5  (via drill 0.3)
  Top 0.16: v160.72,52.53 157.56,52.53 R2.2 | v163.3,52.96 163.45,53.1 164.31,53.1 J4.A5
  Bottom 0.16: v160.72,52.53 162.87,52.53 v163.3,52.96
N$6
  Top 0.16: R1.1 147.38,52.53 156.13,52.53 159.72,56.12 164.31,56.12 J4.B5
N$14
  Top 0.16: 110.92,41.05 109.35,41.05 C16.1 | 110.92,41.05 111.36,41.48 111.64,41.48 D1.1 | 116.38,39.9 115.95,39.47 115.52,39.47 IC2.3 115.37,39.47 115.23,39.61 114.94,39.61 113.94,38.61 111.07,38.61 110.92,38.75 110.92,41.05 | 116.38,39.9 116.38,40.9 115.95,41.34 115.52,41.34 IC2.1 | 116.38,39.9 120.11,36.17 124.7,36.17 128,39.47 128,44.35 Q2.2
N$16  (via drill 0.3)
  Top 0.16: 117.96,40.76 118.24,41.05 118.24,41.34 IC2.5 | 117.96,40.76 118.1,40.62 118.39,40.62 121.26,37.75 121.83,37.75 C27.+ | 117.96,40.76 v117.81,40.62
  Bottom 0.16: v117.81,40.62 116.23,39.04 116.23,36.74 C17.1
N$39
  Top 0.16: R5.2 116.23,49.37 116.23,50.66 116.81,51.24 116.81,53.68 116.67,53.82 116.67,54.97 117.1,55.4 119.25,55.4 120.83,53.82 120.83,49.94 121.11,49.66 121.83,49.66 U4.1
N$40
  Top 0.16: LED1.C 116.09,51.81 116.09,50.95 114.94,49.8 114.94,49.37 R5.1
N$46
  Top 0.16: R6.2 117.53,54.25 117.53,53.82 119.11,52.24 120.11,52.24 120.4,51.95 120.4,50.81 119.25,49.66 U4.5
N$52  (via drill 0.3)
  Top 0.16: C28.1 92.7,36.03 90.55,36.03 89.97,36.6 89.4,36.6 D4.2 89.26,36.6 88.83,36.6 v88.4,37.03 | v79.5,37.89 77.06,37.89 D3.1
  Bottom 0.16: v79.5,37.89 87.53,37.89 v88.4,37.03
N$59  (via drill 0.3)
  Top 0.16: v78.06,16.37 78.06,15.22 J5.24 | v77.92,21.24 77.49,21.68 77.49,21.96 C12.2
  Bottom 0.16: v78.06,16.37 78.06,21.1 v77.92,21.24
N$61  (via drill 0.3)
  Top 0.16: v79.36,16.08 79.07,15.79 79.07,15.22 J5.22 | v81.51,21.68 81.94,22.11 82.51,22.11 C10.2
  Bottom 0.16: v79.36,16.08 79.36,19.52 v81.51,21.68
N$63  (via drill 0.3)
  Top 0.16: v80.22,14.36 80.07,14.5 80.07,15.07 J5.20 | v87.25,21.24 87.68,21.68 87.68,21.96 C7.2
  Bottom 0.16: v80.22,14.36 82.51,14.36 87.25,19.09 v87.25,21.24
N$64  (via drill 0.3)
  Top 0.16: v80.5,16.08 80.5,15.22 J5.19 | v72.47,21.24 72.47,21.96 C8.2
  Bottom 0.16: v80.5,16.08 79.93,15.5 78.21,15.5 v72.47,21.24
N$65  (via drill 0.3)
  Top 0.16: v79.79,13.93 79.93,13.78 80.36,13.78 81.08,14.5 81.08,15.07 J5.18 | v90.41,20.38 90.41,21.82 90.26,21.96 C6.2
  Bottom 0.16: v79.79,13.93 79.93,13.93 80.07,13.78 83.52,13.78 90.12,20.38 v90.41,20.38
N$73  (via drill 0.3)
  Top 0.16: v83.37,14.36 82.66,14.36 82.51,14.5 82.51,15.07 J5.15 | v91.27,21.96 92.7,21.96 C5.2
  Bottom 0.16: v83.37,14.36 83.66,14.36 v91.27,21.96
N$74  (via drill 0.3)
  Top 0.16: v87.97,16.22 87.53,15.79 87.53,15.22 J5.5 | v94.42,21.68 94.85,22.11 95.14,22.11 C4.2
  Bottom 0.16: v87.97,16.22 88.97,16.22 v94.42,21.68
N$75  (via drill 0.3)
  Top 0.16: v87.68,14.36 87.97,14.36 88.11,14.5 88.11,15.07 J5.4 | v96.86,21.53 97.29,21.96 97.72,21.96 C3.2
  Bottom 0.16: v87.68,14.36 89.69,14.36 v96.86,21.53
N$87
  Top 0.16: IC1.5 50.94,98.59 50.94,98.88 58.55,106.48 60.41,106.48 60.56,106.34 60.56,104.91 53.81,98.16 53.38,98.16 C_DELAY.1
N$93
  Top 0.16: U5.3 129.87,51.67 129.87,52.1 U5.2
N$127
  Top 0.16: R_CAPACITOR.1 88.4,62.57 88.68,62.57 89.26,62 90.26,62 90.41,62.14 90.41,63.58 89.83,64.15 89.83,64.44 D2.1
PREVGH  (via drill 0.3)
  Top 0.16: v79.93,16.37 79.93,15.94 79.64,15.65 79.64,15.22 J5.21 | 85.24,21.68 v81.51,17.95 | 85.24,21.68 85.24,21.82 85.1,21.96 C9.2 85.24,21.68 | v85.96,24.69 85.96,32.72 D5.1 | 85.24,21.68 v85.96,22.39
  Bottom 0.16: v81.51,17.95 v79.93,16.37 | v85.96,22.39 v85.96,24.69
PREVGL  (via drill 0.3)
  Top 0.16: v78.64,16.08 78.64,15.22 J5.23 | v79.64,21.24 80.07,21.68 80.07,21.96 | v80.5,35.88 80.5,37.75 D3.2 | v83.23,21.24 81.8,21.24 81.65,21.1 81.36,21.1 80.5,21.96 80.07,21.96 | 80.07,21.96 C11.2
  Bottom 0.16: v78.64,16.08 78.64,20.24 v79.64,21.24 | v80.5,35.88 80.5,25.12 83.23,22.39 v83.23,21.24
RESE
  Top 0.16: J5.3 88.54,15.07 88.54,14.5 84.67,10.63 73.04,10.63 71.89,9.48 69.02,9.48 64,14.5 64,14.93 R8.2 64,15.07 63.86,15.22 61.7,15.22 Q3.2
RESE'  (via drill 0.3)
  Top 0.16: 63.28,11.92 62.57,11.92 61.85,11.2 60.84,11.2 60.27,10.63 60.27,10.05 SJ1.2 | 63.28,11.92 63.43,11.92 R9.2 63.28,11.92 | v65.29,13.93 65.44,14.07 65.44,14.93 R8.1 | 63.28,11.92 v64,12.63
  Bottom 0.16: v64,12.63 v65.29,13.93
RESET  (via drill 0.3)
  Top 0.16: C24.1 69.74,107.2 67.3,107.2 66.44,108.06 65.87,108.06 RESET_BUTTON.3 65.72,108.21 62.28,108.21 RESET_BUTTON.4 62.14,108.21 61.27,108.21 60.13,107.06 59.7,107.06 R_RESET.1 59.55,107.06 59.41,106.92 57.97,106.92 49.51,98.45 v48.93,98.45 48.22,98.45 IC1.1 | v13.78,63.29 10.04,59.56 10.04,46.93 U2.3
  Bottom 0.16: v48.93,98.45 v13.78,63.29
RTC_RST
  Top 0.16: U2.16 22.82,64.44 22.82,65.44 23.82,66.45 80.79,66.45 85.67,61.57 85.67,60.42 U1.4
RX  (1 unrouted)
SCK  (via drill 0.3)  (1 unrouted)
  Top 0.16: v83.8,16.37 83.52,16.08 83.52,15.22 J5.13 | v59.84,51.81 52.66,58.98 52.66,59.42 | v42.76,55.4 42.33,54.97 40.75,54.97 U6.6 40.61,55.11 40.47,54.97 40.47,54.54 40.32,54.39 40.18,54.39 35.16,49.37 15.5,49.37 | v45.92,58.55 46.35,58.98 46.35,59.42 D8.2 46.49,59.42 52.66,59.42 | 15.5,49.37 13.92,47.79 13.92,46.93 U2.6 | v9.61,86.97 9.61,87.69 5.88,91.42 5.02,91.42 J1.P5 | 15.5,49.37 v15.35,49.52 | 52.66,59.42 R21.1
  Bottom 0.16: v83.8,16.37 83.8,19.95 82.66,21.1 82.66,22.54 80.22,24.98 80.22,31.43 v59.84,51.81 | v45.92,58.55 v42.76,55.4 | v9.61,86.97 9.61,55.25 v15.35,49.52
SCL  (via drill 0.3)
  Top 0.16: 157.42,11.92 157.42,6.61 156.84,6.03 155.27,6.03 154.98,6.32 154.98,6.61 R11.1 | 157.42,11.92 v156.27,13.06 156.13,13.21 156.13,13.93 SENSOR2.4 | 157.42,11.92 161.15,11.92 166.6,17.37 166.6,20.24 166.17,20.67 165.31,20.67 J3.4 | v26.55,59.99 21.24,59.99 17.65,63.58 17.65,64.3 U2.20 | v70.17,59.7 80.5,49.37 88.4,49.37 89.4,50.38 89.4,50.81 | 89.4,50.81 89.4,50.95 U1.16 89.4,50.81 | 89.4,50.81 v90.41,50.81
  Bottom 0.16: v26.55,59.99 69.89,59.99 v70.17,59.7 | v156.27,13.06 146.08,13.06 111.07,48.08 93.13,48.08 v90.41,50.81
SDA  (via drill 0.3)
  Top 0.16: R12.1 156.27,6.75 156.7,6.75 157.13,7.18 157.13,11.49 155.27,13.35 155.27,13.93 SENSOR2.3 155.27,14.07 155.27,14.5 155.41,14.64 | 155.41,14.64 155.55,14.79 163.59,14.79 166.32,17.51 166.32,19.52 166.17,19.67 165.31,19.67 J3.3 | v47.5,52.38 39.32,60.56 21.96,60.56 18.94,63.58 18.94,64.3 U2.19 | v88.11,52.38 88.25,52.24 88.25,51.09 U1.15 | 155.41,14.64 151.82,18.23 v140.06,18.23
  Bottom 0.16: v47.5,52.38 v88.11,52.38 122.26,18.23 v140.06,18.23
SRC  (via drill 0.3)  (1 unrouted)
  Top 0.16: 89.4,32.72 89.97,32.72 91.98,34.73 92.7,34.73 C28.2 | v70.6,17.37 60.99,17.37 Q3.3 | v89.83,32.01 89.4,32.44 89.4,32.72 | 89.4,32.72 D5.2
  Bottom 0.16: v70.6,17.37 75.62,17.37 79.64,13.35 83.52,13.35 89.97,19.81 90.55,19.81 91.84,21.1 91.84,30 v89.83,32.01
SS_SD  (via drill 0.3)
  Top 0.16: 20.38,85.53 20.38,91.7 D11.2 | v15.35,63.29 15.35,52.38 11.34,48.37 11.34,46.93 U2.4 | 21.24,83.52 21.24,85.1 20.81,85.53 20.38,85.53 | 21.24,83.52 v21.24,70.03 | 20.38,85.53 R24.1 | 21.24,83.52 11.48,83.52 6.75,88.26 5.45,88.26 J1.P2
  Bottom 0.16: v15.35,63.29 15.35,64.15 v21.24,70.03
TX  (1 unrouted)
USB_D+  (via drill 0.3)
  Top 0.16: v126.28,48.37 151.11,48.37 D12.3 | v25.4,47.36 24.39,47.36 23.96,46.93 U2.14
  Bottom 0.16: v126.28,48.37 93.56,48.37 88.97,52.96 32,52.96 26.4,47.36 v25.4,47.36
USB_D-  (via drill 0.3)
  Top 0.16: v124.42,50.23 151.11,50.23 D12.1 | v26.12,48.08 23.25,48.08 22.82,47.65 22.82,46.93 U2.13
  Bottom 0.16: v124.42,50.23 92.13,50.23 89.11,53.25 31.86,53.25 26.69,48.08 v26.12,48.08
VBAT  (1 unrouted)
  Top 0.305: Q2.3 127,46.86 122.34,51.52 U4.3 122.28,51.52 124.46,53.7 C20.1
VBUS  (1 unrouted)
  Top 0.16: 150.24,43.49 151.68,44.92 151.68,45.35 C15.1 | 150.24,43.49 150.24,43.06 R25.2 150.24,43.49 | 119.39,46.21 119.39,46.5 118.39,47.51 118.39,50.09 118.96,50.66 118.96,51.38 U4.4 | 119.39,46.21 123.98,46.21 125.71,44.49 125.99,44.49 Q2.1 126.14,44.49 126.42,44.49 127.28,45.35 128.43,45.35 130.3,43.49 150.24,43.49 | 119.39,46.21 C19.1
  Top 0.305: C19.1 118.59,46.14 111.81,39.36 D1.2 | Q2.1 126.05,44.44 126.46,44.03 126.46,39.12 125.83,38.49 R3.2 | U4.4 119.03,51.52 118.7,51.84 LED1.A | D12.5 153.13,49.3 152.1,48.27 152.1,47.11 C14.1 C15.1
VRTC
  Top 0.16: C10_SUPERCAP.2 96.14,50.52 93.56,53.1 93.56,62.29 90.41,65.44 89.4,65.44 88.83,64.87 88.8,64.84
  Top 0.305: R_CAPACITOR.2 89.65,62.8 88.9,63.55 88.9,64.73 88.8,64.84 88.37,65.27 87.33,65.27 86.42,64.36 86.42,51.57 U1.14 | C10_SUPERCAP.2 93.81,48.03 C2.1
VUSB
  Top 0.16: J4.A4 164.45,51.81 164.45,51.95 J4.B9 164.45,52.1 165.03,52.1 165.6,52.67 165.6,55.83 164.88,56.55 164.45,56.55 J4.B4 164.45,56.69 164.45,56.83 J4.A9
  Top 0.305: J4.A4 162.4,51.75 154.65,44 R25.1
(copper drawn outside any net)
  shapes: Top area x5